# Altium PCB PCB1.PcbDoc
Units mil, origin at the board's own origin, x right, y up, seen from the top; angles counter-clockwise.
Board outline 3050.03 x 3485.05 mil, 2 copper layers (Top Layer, Bottom Layer); 63 components, 65 nets, 225 pads, 4 vias.
Unrouted connection lines stored in the file: 3.
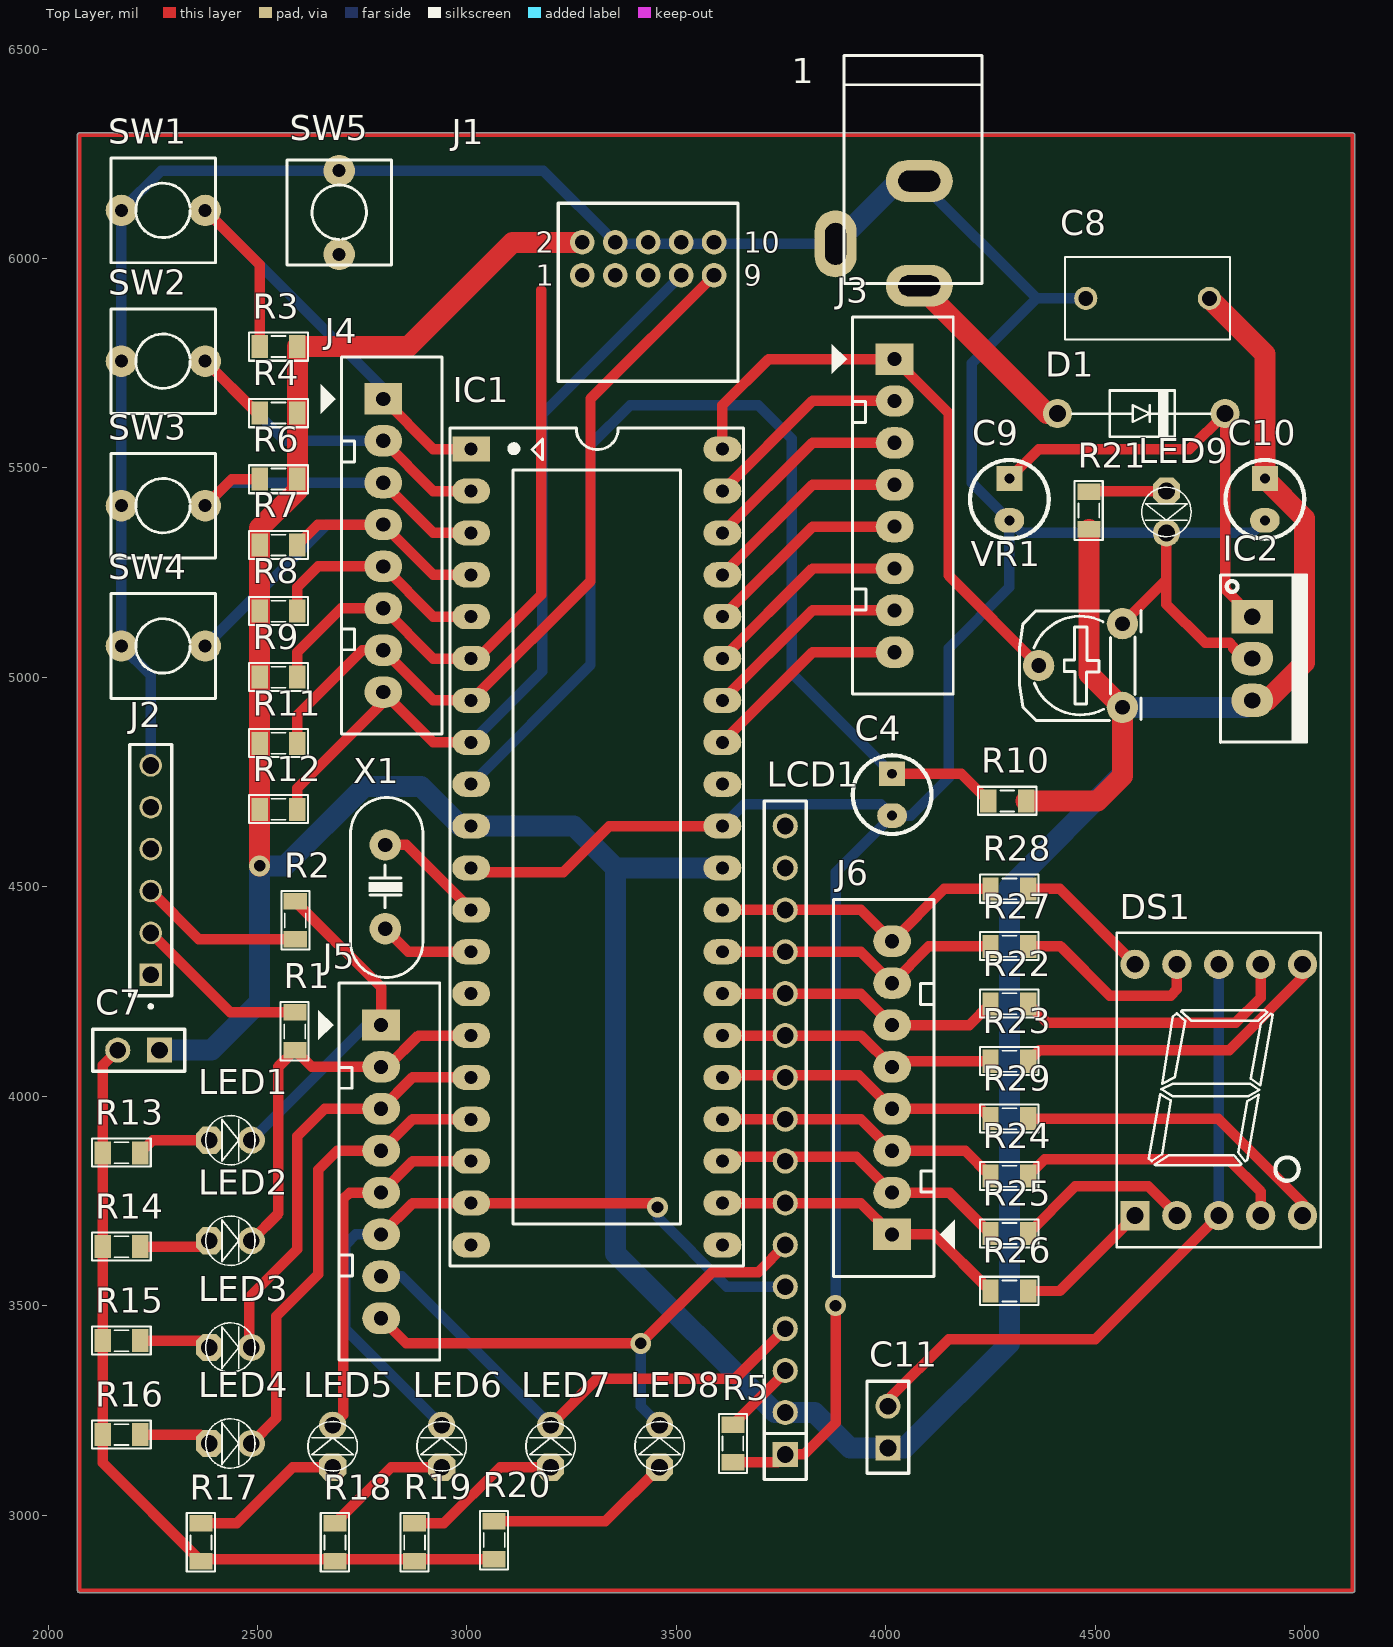
[diagram p0: Top Layer view]
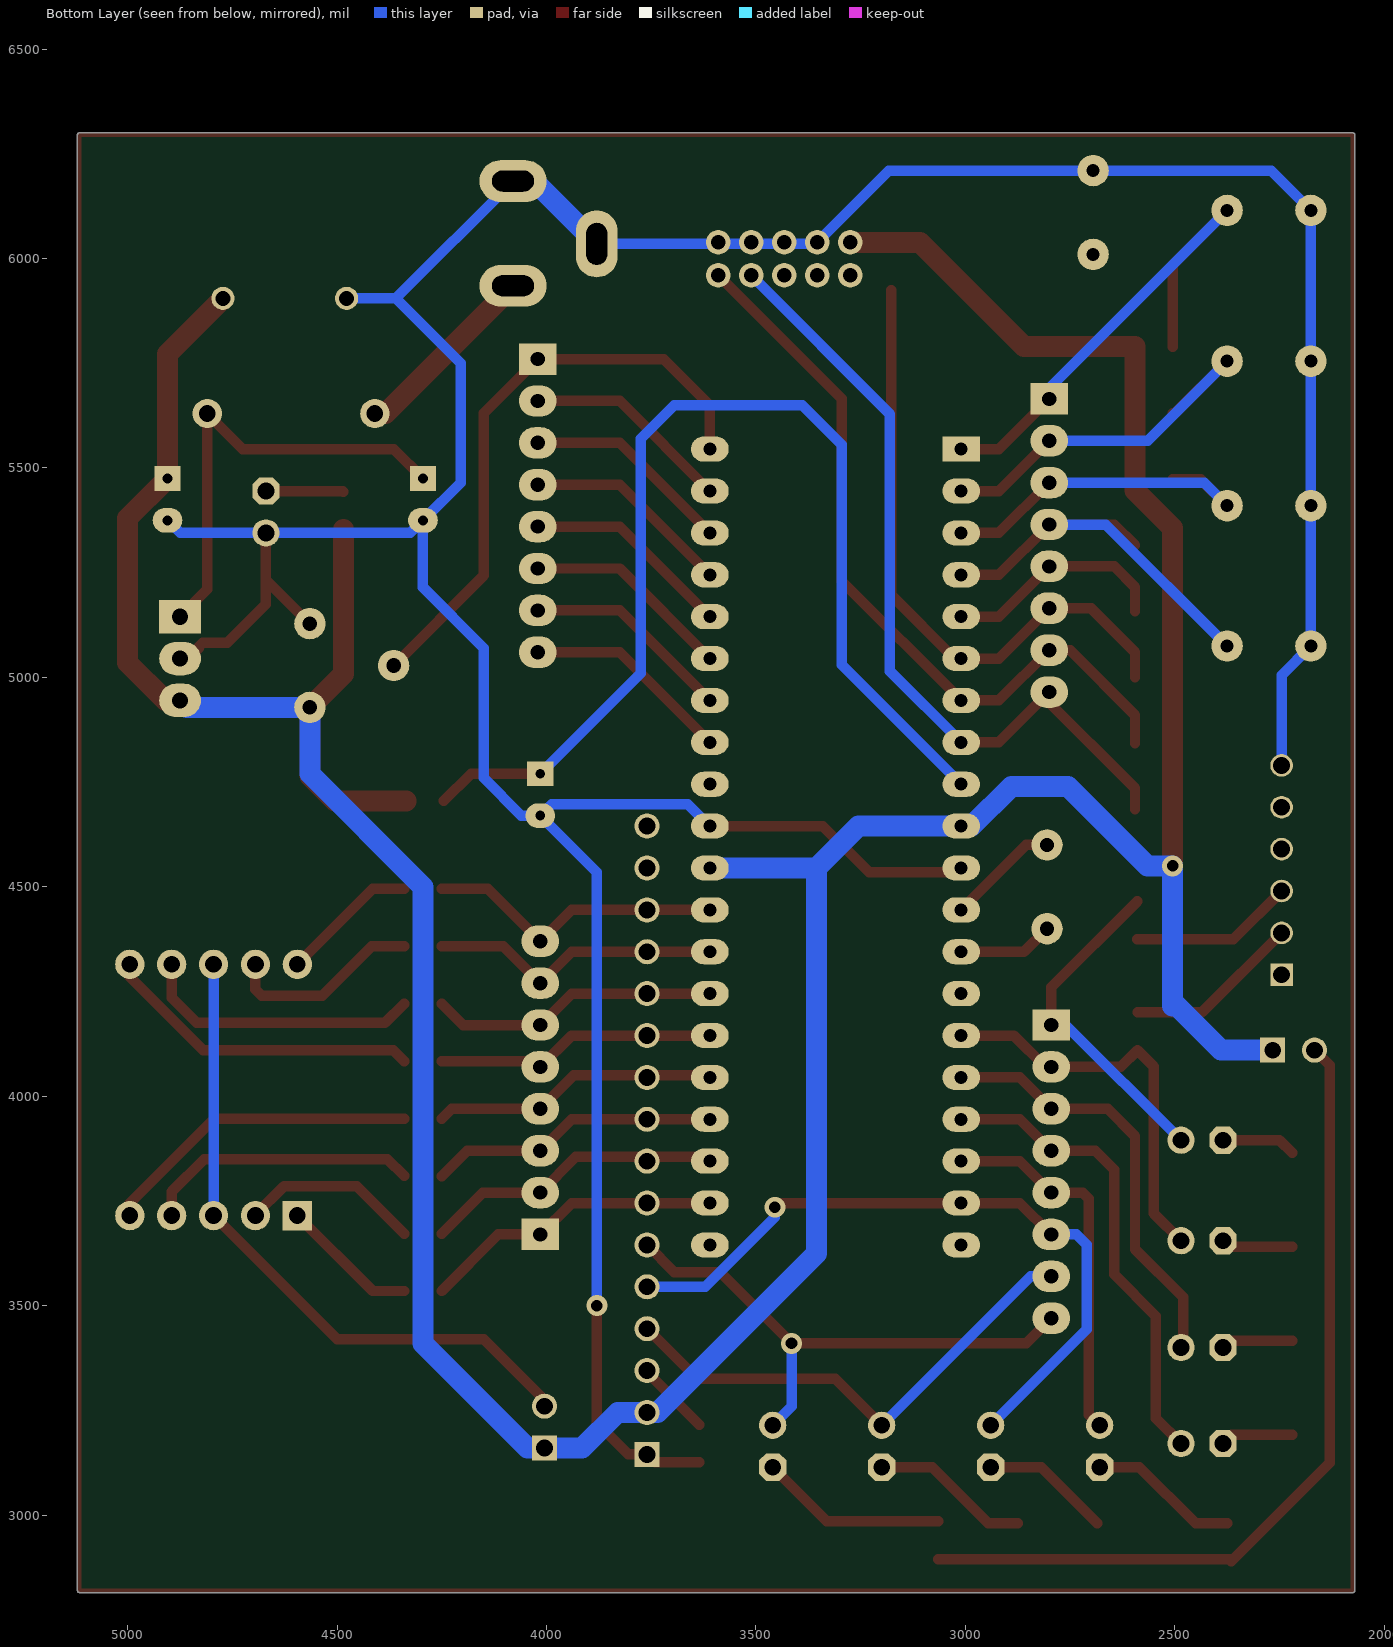
[diagram p1: Bottom Layer view, seen from below]
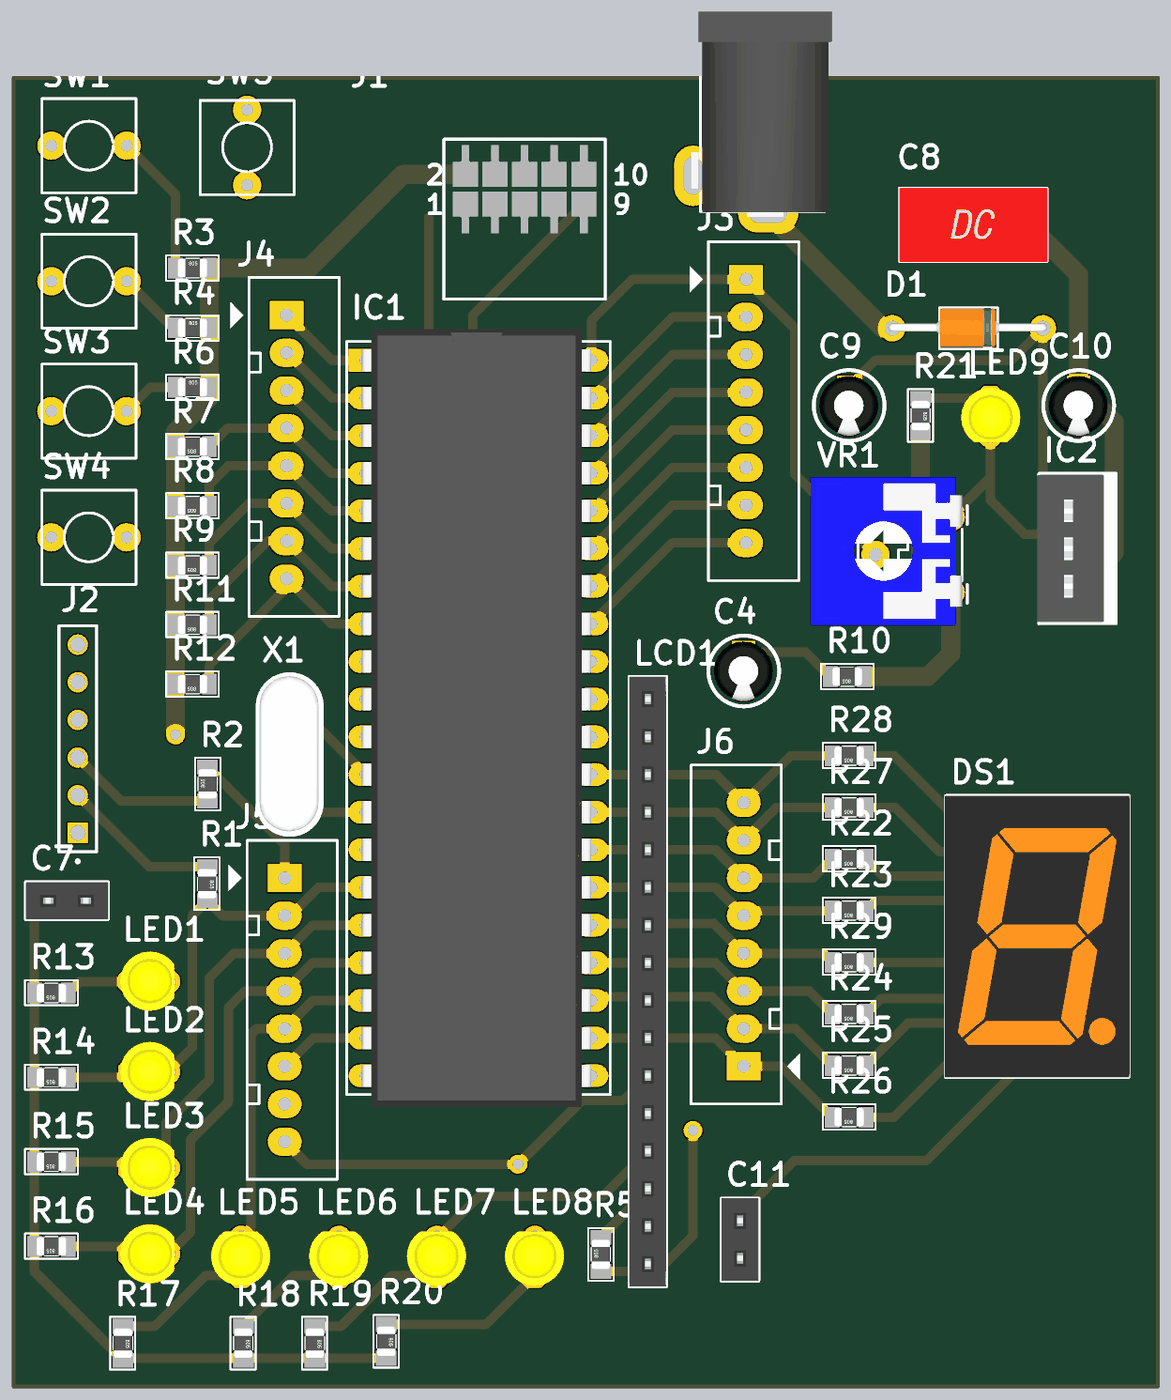
[diagram p2: 3D render of the assembled board from above, using the file's embedded part models]

## Layer stack, top to bottom
Top Solder: solder mask 0.4, Solder Resist, Dk 3.5
Top Layer: signal copper 1.4
Dielectric 1: dielectric 12.6, FR-4, Dk 4.8
Bottom Layer: signal copper 1.4
Bottom Solder: solder mask 0.4, Solder Resist, Dk 3.5

## Board outline
2075,2814.99 cw(c2075,2820) 2069.99,2820 2069.99,6295.02 cw(c2075,6295.02) 2075,6300.03 5115,6300.03 cw(c5115,6295.02) 5120.02,6295.02 5120.02,2820 cw(c5115,2820) 5115,2814.99

## Design rules (kind name [scope] priority, off if disabled: settings)
Clearance [All] p1: gap=10 ignorepadtopadclearanceinfootprint=FALSE except(0: Arc-Hole Track-Hole SMDPad-Hole THPad-Hole Via-Hole Fill-Hole Poly-Hole Region-Hole Text-Hole)
DiffPairsRouting [All] p1: maxlimit=10 minlimit=10 mostfreqgap=10 toplayer_minwidth=10 toplayer_maxwidth=15 toplayer_prefwidth=10 bottomlayer_minwidth=10 bottomlayer_maxwidth=15 bottomlayer_prefwidth=10 maxuncoupledlength=500
HoleSize [All] p1: absolutevalues=TRUE maxlimit=100 minlimit=10 maxpercent=80.000 minpercent=20.000
PolygonConnect [All] p1: connectstyle=Relief reliefconductorwidth=10 reliefentries=4 polygonreliefangle="90 Angle" airgapwidth=10
RoutingVias [All] p1: holewidth=50 width=50 viastyle="Through Hole" minholewidth=10 minwidth=50 maxholewidth=28 maxwidth=50
SolderMaskExpansion [All] p1: expansion=4
Width [All] p1: maxlimit=50 minlimit=10 preferedwidth=25 minimp=50.000000 maximp=50.000000 favimp=50.000000
28 further rules are at their usual default settings.

## Components (designator, comment, footprint, x,y, rotation, side; value= is the part's Value field where it differs from the comment)
1 "Jac DC" DC0 3980,6060 r270 top
C4 "CN-ALU-DIP" CA-ALU-2.54 4015,4720 r270 top value=104
C7 "JP2" JP2-C1T 2266.29,4110 r180 top
C8 "CN-SEMI-DIP" C-SE-7,5x10x9x5x4 4625,5905 r0 top value=104
C9 "CN-ALU-DIP" CA-ALU-2.54 4295,5425 r270 top value=104
C10 "CN-ALU-DIP" CA-ALU-2.54 4905,5425 r270 top value=104
C11 "JP2" JP2-C1T 4005,3160 r90 top
D1 "Diode" DIO-1A 4410,5630 r0 top value=1N5007
DS1 "7SEG" LED7SEG-1-0.56 4790,3990 r0 top
IC1 "ATMEL 16L" DIP40/W0.6 3010,5544.98 r270 top value="Atmega 16L"
IC2 "LM78xx" TO220-123 4875,5145 r270 top
J1 "SAMTEC-TMM-105-01-X-D-RA" SAMTEC-TMM-105-01-X-D-RA 3432.52,5880.51 r0 top
J2 "HW-06-12-T-S-570-230" SAMTEC_HW-06-12-T-S-570-230 2245,4290 r90 top
J3 "PA" Header8 4021,5760 r270 top value="Connector 8"
J4 "PB" Header8 2800,5665 r270 top value="Connector 8"
J5 "PD" Header8 2795,4170 r270 top value="Connector 8"
J6 "PC" Header8 4015,3670 r90 top value="Connector 8"
LCD1 "LCD 16x2A" JP16-C1T 3760,3144.98 r90 top value=LCD16x2A
LED1 "LED" LED-3MM-YELLOW 2385,3895 r0 top value="LED 3 ly Single Colour"
LED2 "LED" LED-3MM-YELLOW 2385,3655 r0 top value="LED 3 ly Single Colour"
LED3 "LED" LED-3MM-YELLOW 2385,3400 r0 top value="LED 3 ly Single Colour"
LED4 "LED" LED-3MM-YELLOW 2385,3170.86 r0 top value="LED 3 ly Single Colour"
LED5 "LED" LED-3MM-YELLOW 2679.36,3114.36 r90 top value="LED 3 ly Single Colour"
LED6 "LED" LED-3MM-YELLOW 2939.57,3114.36 r90 top value="LED 3 ly Single Colour"
LED7 "LED" LED-3MM-YELLOW 3199.79,3114.36 r90 top value="LED 3 ly Single Colour"
LED8 "LED" LED-3MM-YELLOW 3460,3114.36 r90 top value="LED 3 ly Single Colour"
LED9 "LED" LED-3MM-YELLOW 4670,5444.98 r270 top value="LED 3 ly Single Colour"
R1 "10K" RES-SMD-0805 2589,4155 r270 top
R2 "10K" RES-SMD-0805 2590,4420 r90 top
R3 "10K" RES-SMD-0805 2550,5790 r0 top
R4 "Res" RES-SMD-0805 2550,5631.29 r0 top
R5 "Res" RES-SMD-0805 3635,3170.86 r90 top
R6 "Res" RES-SMD-0805 2550,5473.57 r0 top
R7 "Res" RES-SMD-0805 2550,5315.86 r180 top
R8 "Res" RES-SMD-0805 2550,5158.14 r180 top
R9 "Res" RES-SMD-0805 2550,5000.43 r180 top
R10 "Res" RES-SMD-0805 4290,4705 r180 top
R11 "Res" RES-SMD-0805 2550,4842.71 r180 top
R12 "Res" RES-SMD-0805 2550,4685 r180 top
R13 "Res" RES-SMD-0805 2175,3865 r180 top
R14 "Res" RES-SMD-0805 2175,3640.71 r180 top
R15 "Res" RES-SMD-0805 2175,3416.43 r180 top
R16 "Res" RES-SMD-0805 2175,3192.14 r180 top
R17 "Res" RES-SMD-0805 2365,2935 r270 top
R18 "Res" RES-SMD-0805 2685,2935 r270 top
R19 "Res" RES-SMD-0805 2875,2935 r270 top
R20 "Res" RES-SMD-0805 3065,2940 r270 top
R21 "Res" RES-SMD-0805 4485,5398.5 r270 top
R22 "Res" RES-SMD-0805 4295,4220.71 r180 top
R23 "Res" RES-SMD-0805 4295,4083.57 r180 top
R24 "Res" RES-SMD-0805 4295,3809.29 r180 top
R25 "Res" RES-SMD-0805 4295,3672.14 r180 top
R26 "Res" RES-SMD-0805 4295,3535 r180 top
R27 "Res" RES-SMD-0805 4295,4357.86 r180 top
R28 "Res" RES-SMD-0805 4295,4495 r180 top
R29 "Res" RES-SMD-0805 4295,3946.43 r180 top
SW1 "SW" SW2 2175,6115 r0 top value="SW chip 2 pin"
SW2 "SW" SW2 2175,5755 r0 top value="SW chip 2 pin"
SW3 "SW" SW2 2175,5410 r0 top value="SW chip 2 pin"
SW4 "SW" SW2 2175,5075 r0 top value="SW chip 2 pin"
SW5 "SW" SW2 2695,6210 r270 top value="SW chip 2 pin"
VR1 "10K" VR 4565,4928.35 r90 top value="VR 10K"
X1 "12Mhz" XT2 2805,4500 r270 top value=4Mhz

## Footprints (in the part's own frame and the unit in brackets; to place one, negate y for a bottom-side part, rotate by r counter-clockwise, add the part's x,y. Pads: shape width x height; smd on the part's side, far side on the other; paste and mask are expansions set on the pad)
C-SE-7,5x10x9x5x4 [mm] "Film Capacitors, 2-Leads, Body 7,5x10x9x5"
  round 1.4 hole 0.9: 1(-3.75,0) 2(3.75,0)
  silkscreen extent -5,-2.5 5,2.5, body extent -5,-2.5 5,2.5, height 9.01
CA-ALU-2.54 [mm]
  rect 1.5x1.58 hole 0.6: 1(-1.27,0)
  oval 1.5x1.8 hole 0.6: 2(1.27,0)
  silkscreen extent -2.39,-2.39 2.39,2.39, body extent -2,-2.03 1.99,1.97, height 7.01
DC0 [mil] "Jac DC input"
  oval 100x160 hole 50 slot 100 at 90 deg: 1(125,100) 2(-125,100)
  oval 160x100 hole 50 slot 100 at 0 deg: 3(25,-100)
  silkscreen extent -425,-80 120,250, body extent -410,-105 134,269, height 434
DIO-1A [mil]
  round 70 hole 40: 1(0,0) 2(400,0)
  silkscreen extent 35,-55 365,55, body extent -11,-50 411,54, height 102
DIP40/W0.6 [mil] "40 PIN, W 600mil, Pin to pin 100mil"
  rect 60x90 hole 31: 1(0,0)
  oval 60x90 hole 31: 2(100,0) 3(200,0) 4(300,0) 5(400,0) 6(500,0) 7(600,0) 8(700,0) 9(800,0) 10(900,0) 11(1000,0) 12(1100,0) 13(1200,0) 14(1300,0) 15(1400,0) 16(1500,0) 17(1600,0) 18(1700,0) 19(1800,0) 20(1900,0) 21(1900,600) 22(1800,600) 23(1700,600) 24(1600,600) 25(1500,600) 26(1400,600) 27(1300,600) 28(1200,600) 29(1100,600) 30(1000,600) 31(900,600) 32(800,600) 33(700,600) 34(600,600) 35(500,600) 36(400,600) 37(300,600) 38(200,600) 39(100,600) 40(0,600)
  silkscreen extent -50,-50 1950,650, body extent -82,-10 1982,600, height 224
Header8 [mil] "CON8"
  rect 75x90 hole 34: 1(0,0)
  oval 75x90 hole 34: 2(100,0) 3(200,0) 4(300,0) 5(400,0) 6(500,0) 7(600,0) 8(700,0)
  silkscreen extent -100,-150 800,140
JP2-C1T [mm] "2 row, straight, gold plating"
  rect 1.52x1.52 hole 1.02: 1(0,0)
  round 1.52 hole 1.02: 2(2.54,0)
  silkscreen extent -1.52,-1.27 4.06,1.27, body extent -1.52,-1.25 4.06,1.25, height 8.51
JP16-C1T [mm] "16 row, straight, gold plating"
  rect 1.52x1.52 hole 1.02: 1(0,0)
  round 1.52 hole 1.02: 2(2.54,0) 3(5.08,0) 4(7.62,0) 5(10.16,0) 6(12.7,0) 7(15.24,0) 8(17.78,0) 9(20.32,0) 10(22.86,0) 11(25.4,0) 12(27.94,0) 13(30.48,0) 14(33.02,0) 15(35.56,0) 16(38.1,0)
  silkscreen extent -1.52,-1.27 39.62,1.27, body extent -1.52,-1.25 39.62,1.25, height 8.51
LED7SEG-1-0.56 [mil]
  rect 70x70 hole 40: 1(-195,-275)
  round 70 hole 40: 2(-95,-275) 3(5,-275) 4(105,-275) 5(205,-275) 6(205,325) 7(105,325) 8(5,325) 9(-95,325) 10(-195,325)
  silkscreen extent -239,-350 249,400, body extent -241,-349 251,399, height 315
LED-3MM-YELLOW [mil]
  oct 65x65 hole 40: 1(0,0)
  round 65 hole 40: 2(100,0)
  silkscreen extent -9,-59 109,59, body extent -27,-77 117,80, height 181
RES-SMD-0805 [mil]
  rect 39.37x55 smd: 1(-45,0) 2(45,0)
  silkscreen extent -70,-34 70,33, body extent -39,-25 39,25, height 31
SAMTEC-TMM-105-01-X-D-RA [mm]
  round 1.49 hole 0.89 mask+0: 1(-4,2.019) 2(-4,4.019) 3(-2,2.019) 4(-2,4.019) 5(0,2.019) 6(0,4.019) 7(2,2.019) 8(2,4.019) 9(4,2.019) 10(4,4.019)
  silkscreen extent -5.45,-4.4 5.45,6.39
SAMTEC_HW-06-12-T-S-570-230 [mm]
  rect 1.37x1.37 hole 1.02: 01(0,0)
  round 1.37 hole 1.02: 02(2.54,0) 03(5.08,0) 04(7.62,0) 05(10.16,0) 06(12.7,0)
  silkscreen extent -2.02,-1.27 13.97,1.27
SW2 [mil] "SW button 2pin, 250x 250 mil"
  round 75 hole 31: 1(0,0) 2(200,0)
  silkscreen extent -25,-125 225,125
TO220-123 [mil] "TO-220 - 1-2-3"
  rect 80x100 hole 39: 1(0,0)
  oval 80x100 hole 39: 2(100,0) 3(200,0)
  silkscreen extent -100,-76 300,130, body extent -95,-80 295,97, height 323
VR [mil] "Resistor Variable"
  round 75 hole 35: 1(0,0) 2(100,200) 3(200,0)
  silkscreen extent -31,-44 231,246, body extent -87,-30 307,372, height 165
XT2 [mil] "Footpin for Crystal 2 pin"
  round 75 hole 34: 1(-100,0) 2(100,0)
  silkscreen extent -213,-83 217,90, body extent -216,-87 216,90, height 144

## Part data
1: library part DCIN, "Jac DC input"
C4 C8 C9 C10: "Capacitor (Semiconductor SIM Model)", LatestRevisionDate=17-Jul-2002, LatestRevisionNote="Re-released for DXP Platform.", PackageReference=C1206, Publisher="Altium Limited"
C7 C11: "WR-PHD 2.54 mm Angled Socket Header", Manufacturer="Würth Elektronik eiSos GmbH", partNo=613002143121, ComponentLink1 Description=Manufacturer, ComponentLink1URL=http://www.we-online.com, ComponentLink2 Description=Datasheet, ComponentLink2URL=http://katalog.we-online.de/em/datasheet/6130xx143121.pdf, Created by="Karrer Zheng", Created Date="29 March 2013", NoPins=02
D1: "Default Diode", Code - JEDEC=DO-214-AB, Published=8-Jun-2000, Publisher="Altium Limited", Revision="July-2002: Re-released for DXP Platform."
DS1: library part LED7SEG-1, "14.2 mm General Purpose Blue 7-Segment Display: CC, RH DP, Gray Surface", Colour=Blue, PackageDocument=24-Sep-2002, ComponentLink1Description="Manufacturer Link", ComponentLink1URL=http://www.agilent.com/, DatasheetDocument=24-Sep-2002, LatestRevisionDate=17-Dec-2003, LatestRevisionNote="Schematic revised, PCB Footprint replaced.", MinimumIntensity="2020 ucd", Note="IF = 10 mA", PackageReference=H, Published=8-Jun-2000, Publisher="Altium Limited"
IC1: library part Atmega16L, "8-Bit AVR Microcontroller with 16K Bytes of In-System Programmable Flash Memory"
IC2: "Positive Voltage Regulator", ComponentLink1Description="Manufacturer Link", ComponentLink1URL=http://www.st.com/, ComponentLink2Description=Datasheet, ComponentLink2URL=http://www.st.com/stonline/products/literature/ds/2146/l78m05c.pdf, DatasheetVersion=Apr-1994, LatestRevisionDate=17-Jul-2002, LatestRevisionNote="Re-released for DXP Platform.", Note="Tab is connected to pin 3 (GND).", PackageDescription="TO, Thru-Hole, Vertical, Heatsink Mounted; 3 In-Line Leads; Pitch 2.54 mm; Pin sequence 1, 3, 2", PackageReference=ISOWATT220AB, PackageVersion=Jul-1998, Published=24-Aug-2001, Publisher="Altium Limited"
J1 J2: Package=None, Availability=Unavailable, Price=None
  J1: MF=Samtec, MP=SAMTEC-TMM-105-01-X-D-RA
  J2: MP=HW-06-12-T-S-570-230
J3 J4 J5 J6: library part Header8, "Connector 8"
LCD1: library part LCD16x2A, "LCD dipslay 16 char, 2 line"
LED1 LED2 LED3 LED4 LED5 LED6 LED7 LED8 LED9: "LED Single colour Green and Red"
R1 R2 R3: library part Res-SMD, "R3", Manufacturer="Generic Components", Class=Passive, Published=08/06/2000, Publisher="Altium Hobart Technology Centre"
R4 R5 R6 R7 R8 R9 R10 R11 R12 R13 R14 R15 R16 R17 R18 R19 R20 R21 R22 R23 R24 R25 R26 R27 R28 R29: library part Res-SMD, "Resistor", Manufacturer="Generic Components", Class=Passive, Published=08/06/2000, Publisher="Altium Hobart Technology Centre"
SW1 SW2 SW3 SW4 SW5: library part SW2, "Switch button 2 pin"
VR1: library part VR1, "Var Resistor"
X1: library part XT2, "Crystal, 32.768 KHz, -40 to 85 degC, 3.2 x 1.5 x 0.9 mm SMD"

## Via types
v1: diameter 50, hole 28, Top Layer to Bottom Layer, 4 vias

## Nets (pads, with @x,y where several pads share a name; then routed paths per layer and width w, separated by ;. In a path a pad name is that pad's centre, name@x,y a point inside that pad or via, vN(x,y) a via of type N, cw(c..) or ccw(c..) an arc to the next point about the centre after c; other vN are vias at no path point)
"AVR RX": IC1.14 J5.1 LED1.2 R2.2 | length 803.8
  Top Layer w25: R2.2 2795,4260 J5.1
  Bottom Layer w25: LED1.2 2760,4170 J5.1
"AVR TX": IC1.15 J5.2 LED2.2 R1.2 | length 966.7
  Top Layer w25: LED2.2 2550,3720 2550,4071 R1.2 2629,4070 J5.2 2809.32,4070 2884.3,4144.98 IC1.15
"FT RX": J2.02 R1.1 | length 422.7
  Top Layer w25: J2.02 2435,4200 R1.1
"FT TX": J2.03 R2.1 | length 392.6
  Top Layer w25: J2.03 2360,4375 R2.1
GND: 1.2 1.3 C4.2 C8.1 C9.2 C10.2 IC1.11 IC1.31 IC2.2 J1.4 J1.6 J1.8 J1.10 J2.06 LCD1.1 LED9.2 R5.1 SW1.1 SW2.1 SW3.1 SW4.1 SW5.1 VR1.3 | length 9517
  Top Layer w25: IC1.11 3019.99,4535 3230,4535 3339.99,4644.98 IC1.31 ; R5.1 3740.87,3125.86 LCD1.1 3804.98,3144.98 3880,3220 v1(3880,3500) ; VR1.3 4670,5233.35 ; LED9.2 4670,5233.35 ; IC2.2 4855,5045 4830,5070 4830,5073.35 4820.85,5082.5 4762.5,5082.5 4670,5175 4670,5233.35
  Bottom Layer w25: J2.06 2245,5005 SW4.1 SW3.1 SW2.1 SW1.1 2270,6210 SW5.1 3182.52,6210 J1.4 3357.52,6035 1.3 ; IC1.31 3662.42,4697.41 3987.59,4697.41 C4.2 ; v1(3880,3500) 3880,4535 C4.2 ; 1.2@4030,6185 1.2 4360,5905 ; C8.1 4360,5905 ; C10.2 4874.98,5344.98 LED9.2 4325.02,5344.98 C9.2 ; C4.2 4060,4670 4150,4760 4150,5070 4295,5215 C9.2 ; C9.2 4205,5465 4205,5750 4360,5905
  Bottom Layer w50: 1.3 1.2@4030,6185
MISO: IC1.7 J1.9 J4.7 R11.1 | length 1851.5
  Top Layer w25: R11.1 2595,4910 2750,5065 J4.7 2920.01,4944.98 IC1.7 3295,5229.98 3295,5665 J1.9
MOSI: IC1.6 J1.1 J4.6 R9.1 | length 1525.4
  Top Layer w25: R9.1 2595,5060 2700,5165 J4.6 2920.01,5044.98 IC1.6 3024.99,5044.98 3177.52,5197.52 3177.52,5924.49
Net1_1: 1.1 D1.1 | length 456.3
  Top Layer w50: 1.1 4385,5630 D1.1
NetC3_2: IC1.32
NetC4_1: C4.1 IC1.9 R10.2 | length 2636.9
  Top Layer w25: C4.1 4180,4770 R10.2
  Bottom Layer w25: IC1.9 3295,5029.98 3295,5555 3390,5650 3695,5650 3775,5570 3775,5010 C4.1
NetC5_2: IC1.12 X1.1 | length 269.2
  Top Layer w25: X1.1 2854.99,4600 IC1.12
NetC6_2: IC1.13 X1.2 | length 227.8
  Top Layer w25: X1.2 2860.01,4344.98 IC1.13
NetC7_2: C7.2 R13.2 R14.2 R15.2 R16.2 R17.2 R18.2 R19.2 R20.2 | length 2034.4
  Top Layer w25: C7.2 2130,4073.72 R13.2 R14.2 R15.2 R16.2 2130,3125 R17.2 2370,2895 R20.2
NetC9_1: C9.1 D1.2 IC2.1 | length 1091.1
  Top Layer w25: C9.1 4364.98,5544.98 4724.98,5544.98 D1.2 4810,5210 IC2.1
NetC11_2: C11.2 DS1.3 DS1.8 | length 1587.3
  Top Layer w25: C11.2 4005,3275 4150,3420 4500,3420 DS1.3
  Bottom Layer w25: DS1.3 DS1.8
NetDS1_1: DS1.1 R26.1 | length 329.6
  Top Layer w25: R26.1 4415,3535 DS1.1
NetDS1_2: DS1.2 R25.1 | length 431.8
  Top Layer w25: R25.1 4452.86,3785 4626.82,3785 4695,3716.82 DS1.2
NetDS1_4: DS1.4 R24.1 | length 661.2
  Top Layer w25: R24.1@4340,3810 4380,3850 4817.5,3850 4895,3772.5 DS1.4
NetDS1_5: DS1.5 R29.1 | length 768.4
  Top Layer w25: R29.1 4793.57,3946.43 4995,3745 DS1.5
NetDS1_6: DS1.6 R23.1 | length 768.1
  Top Layer w25: R23.1 4366.43,4110 4819.5,4110 4995,4285.5 DS1.6
NetDS1_7: DS1.7 R22.1 | length 678.8
  Top Layer w25: R22.1 4385.72,4175 4835,4175 4895,4235 DS1.7
NetDS1_9: DS1.9 R27.1 | length 470
  Top Layer w25: R27.1 4417.14,4357.86 4535,4240 4680,4240 4695,4255 DS1.9
NetDS1_10: DS1.10 R28.1 | length 329.6
  Top Layer w25: R28.1 4415,4495 DS1.10
NetLCD1_3: LCD1.3 R5.2 | length 180.9
  Top Layer w25: R5.2 3760,3340.86 LCD1.3
NetLED1_1: LED1.1 R13.1 | length 177.4
  Top Layer w25: R13.1 2250,3895 LED1.1
NetLED2_1: LED2.1 R14.1 | length 170.9
  Top Layer w25: R14.1 2370.71,3640.71 LED2.1
NetLED3_1: LED3.1 R15.1 | length 171.8
  Top Layer w25: R15.1 2368.57,3416.43 LED3.1
NetLED4_1: LED4.1 R16.1 | length 173.8
  Top Layer w25: R16.1 2363.71,3192.14 LED4.1
NetLED5_1: LED5.1 R17.1 | length 360
  Top Layer w25: R17.1@2375,2980 2450,2980 2584.36,3114.36 LED5.1
NetLED6_1: LED6.1 R18.1 | length 310.2
  Top Layer w25: R18.1 2819.36,3114.36 LED6.1
NetLED7_1: LED7.1 R19.1 | length 380.4
  Top Layer w25: R19.1 2945,2980 3079.36,3114.36 LED7.1
NetLED8_1: LED8.1 R20.1 | length 448.6
  Top Layer w25: R20.1 3330.64,2985 LED8.1
NetLED9_1: LED9.1 R21.1 | length 185.6
  Top Layer w25: R21.1 4486.48,5444.98 LED9.1
PA0: IC1.40 J3.1 VR1.2 | length 1435.7
  Top Layer w25: IC1.40 3610,5650 3720,5760 J3.1 4150,5631 4150,5243.35 VR1.2
PA1: IC1.39 J3.2 | length 500.1
  Top Layer w25: IC1.39 3825.01,5660 J3.2
PA2: IC1.38 J3.3 | length 500.1
  Top Layer w25: IC1.38 3825.01,5560 J3.3
PA3: IC1.37 J3.4 | length 500.1
  Top Layer w25: IC1.37 3825.01,5460 J3.4
PA4: IC1.36 J3.5 | length 500.1
  Top Layer w25: IC1.36 3825.01,5360 J3.5
PA5: IC1.35 J3.6 | length 500.1
  Top Layer w25: IC1.35 3825.01,5260 J3.6
PA6: IC1.34 J3.7 | length 500.1
  Top Layer w25: IC1.34 3825.01,5160 J3.7
PA7: IC1.33 J3.8 | length 500.1
  Top Layer w25: IC1.33 3825.01,5060 J3.8
PB0: IC1.1 J4.1 R3.1 SW1.2 | length 1275
  Top Layer w25: SW1.2 2505,5985 R3.1 ; J4.1 2920.01,5544.98 IC1.1
  Bottom Layer w25: SW1.2 J4.1@2825,5665
PB1: IC1.2 J4.2 R4.1 SW2.2 | length 969.7
  Top Layer w25: SW2.2 2498.71,5631.29 R4.1 ; J4.2 2920.01,5444.98 IC1.2
  Bottom Layer w25: SW2.2 2565,5565 J4.2 J4.2@2825,5565
PB2: IC1.3 J4.3 R6.1 SW3.2 | length 888.8
  Top Layer w25: SW3.2 2438.57,5473.57 R6.1 ; J4.3 2920.01,5344.98 IC1.3
  Bottom Layer w25: SW3.2 2430,5465 J4.3 J4.3@2825,5465
PB3: IC1.4 J4.4 R7.1 SW4.2 | length 1055.2
  Top Layer w25: R7.1 2644.14,5365 J4.4 2920.01,5244.98 IC1.4
  Bottom Layer w25: SW4.2 2665,5365 J4.4 J4.4@2825,5365
PB4: IC1.5 J4.5 R8.1 | length 542.3
  Top Layer w25: R8.1 2595,5215 2645,5265 J4.5 2920.01,5144.98 IC1.5
PB6: IC1.20
PB7: IC1.21
PC0: IC1.22 J6.1 LCD1.7 R26.2 | length 727
  Top Layer w25: IC1.22 3940.01,3744.99 J6.1 4115,3670 R26.2
PC1: IC1.23 J6.2 LCD1.8 R25.2 | length 719.9
  Top Layer w25: IC1.23 3620.01,3855 3930,3855 J6.2 4152.14,3770 R25.2
PC2: IC1.24 J6.3 LCD1.9 R24.2 | length 696.2
  Top Layer w25: IC1.24 3940.01,3944.99 J6.3 4189.29,3870 R24.2
PC3: IC1.25 J6.4 LCD1.10 R29.2 | length 685
  Top Layer w25: IC1.25 3615.01,4050 3935,4050 J6.4 4226.43,3970 R29.2
PC4: IC1.26 J6.5 LCD1.11 R23.2 | length 676.7
  Top Layer w25: IC1.26 3940.01,4144.98 J6.5 4028.57,4083.57 R23.2
PC5: IC1.27 J6.6 LCD1.12 R22.2 | length 692.1
  Top Layer w25: IC1.27 3940.01,4244.98 J6.6 4199.29,4170 R22.2
PC6: IC1.28 J6.7 LCD1.13 R27.2 | length 707.5
  Top Layer w25: IC1.28 3940.01,4344.98 J6.7 4102.86,4357.86 R27.2
PC7: IC1.29 J6.8 LCD1.14 R28.2 | length 722.8
  Top Layer w25: IC1.29 3940.01,4444.98 J6.8 4140,4495 R28.2
PD2: IC1.16 J5.3 LED3.2 | length 1025.6
  Top Layer w25: LED3.2@2480,3400 2480,3520 2595,3635 2595,3905 2660,3970 J5.3 2869.99,4044.99 IC1.16
PD3: IC1.17 J5.4 LED4.2 | length 1135.1
  Top Layer w25: LED4.2 2545,3230.86 2545,3475 2645,3575 2645,3825 2690,3870 J5.4 2869.99,3944.99 IC1.17
PD4: IC1.18 J5.5 LED5.2 | length 893.5
  Top Layer w25: LED5.2 2705,3240 2705,3755 2720,3770 J5.5 2869.99,3844.99 IC1.18
PD5: IC1.19 J5.6 LCD1.5 LED6.2 | length 1714.2
  Top Layer w25: J5.6 2869.99,3744.99 IC1.19 3445.01,3744.99 v1(3455,3735)
  Bottom Layer w25: J5.6 2735,3670 2710,3645 2710,3443.93 LED6.2 ; v1(3455,3735) 3455,3710.74 3620.75,3544.98 LCD1.5
PD6: J5.7 LCD1.4 LED7.2 | length 1207.8
  Top Layer w25: LED7.2 3310.43,3325 3640.02,3325 LCD1.4
  Bottom Layer w25: J5.7 2844.14,3570 LED7.2
PD7: J5.8 LCD1.6 LED8.2 | length 1301.5
  Top Layer w25: J5.8 2855,3410 v1(3415,3410) 3585,3580 3695.02,3580 LCD1.6
  Bottom Layer w25: v1(3415,3410) 3415,3259.36 LED8.2
RESET: J1.5 SW5.2
SCK: IC1.8 J1.7 J4.8 R12.1 | length 1939.9
  Top Layer w25: R12.1 2595,4735 J4.8@2812.5,4952.5 ; J4.8 J4.8@2812.5,4952.5 ; IC1.8 2920.01,4844.98 J4.8@2812.5,4952.5
  Bottom Layer w25: IC1.8 3180,5014.98 3180,5628.74 J1.7
VCC: C7.1 C8.2 C10.1 C11.1 IC1.10 IC1.30 IC2.3 J1.2 LCD1.2 R3.2 R4.2 R6.2 R7.2 R8.2 R9.2 R10.1 R11.2 R12.2 R21.2 VR1.1 | length 10038.2
  Top Layer w50: v1(2505,4550) R12.2 R11.2 R9.2 R8.2 R7.2 2505,5356.39 2595,5446.39 R6.2 R4.2 R3.2 2860,5790 3108.74,6038.74 J1.2 ; R10.1 4505,4705 4565,4765 VR1.1 4485,5008.35 R21.2 ; C8.2 4905,5772.64 C10.1 5000,5380 5000,5035 4910,4945 IC2.3
  Bottom Layer w50: C7.1 2390,4110 2495,4215 ; 2505,4215 v1(2505,4550) 2565,4550 2755,4740 2890,4740 2985.01,4644.98 IC1.10 3255.01,4644.98 3355.01,4544.98 ; IC1.30 3355.01,4544.98 ; IC2.3 4858.35,4928.35 VR1.1 4565,4770 4295,4500 4295,3410 4045,3160 C11.1 3915,3160 3830.02,3244.98 LCD1.2 3735.02,3244.98 3355.01,3624.99 3355.01,4544.98
pads on no net: J1.3 J2.01 J2.04 J2.05 LCD1.15 LCD1.16
copper on no net: | length 13275
  Top Layer w10: 2120,6295.02 5115,6295.02 5115,2820 2075,2820 2075,6295.02 2365,6295.02

## Polygon pours and split planes (outlines as drawn)
GND on Top Layer (solid, pour order 0): 5115,2820 2075,2820 2075,6295.02 5115,6295.02

## Text inside footprints (layer, text, board x,y; h text height)
J1: Top Overlay "1" at 3164.02,5935 h50; Top Overlay "2" at 3164.02,6013.74 h50; Top Overlay "9" at 3660.51,5935 h50; Top Overlay "10" at 3660.51,6013.74 h50; Mechanical 13 "1.524" at 2964.02,5875.51 h10; Mechanical 13 "2.000" at 3039.02,5995.51 h10; Mechanical 13 "1" at 3164.02,5935 h50; Mechanical 13 "2" at 3164.02,6013.74 h50; Mechanical 13 "2.000" at 3171.54,6170.51 h10; Mechanical 13 "10.033" at 3401.02,5685.51 h10; Mechanical 13 "8.000" at 3406.54,6210.51 h10; Mechanical 13 "9" at 3660.51,5935 h50; Mechanical 13 "10" at 3660.51,6013.74 h50